# Altium PCB CV2018-DIFF.PcbDoc
Units mil, origin at the board's own origin, x right, y up, seen from the top; angles counter-clockwise.
Board outline 6299 x 3937 mil, 2 copper layers (TopLayer, BottomLayer); 56 components, 65 nets, 321 pads, 59 vias.
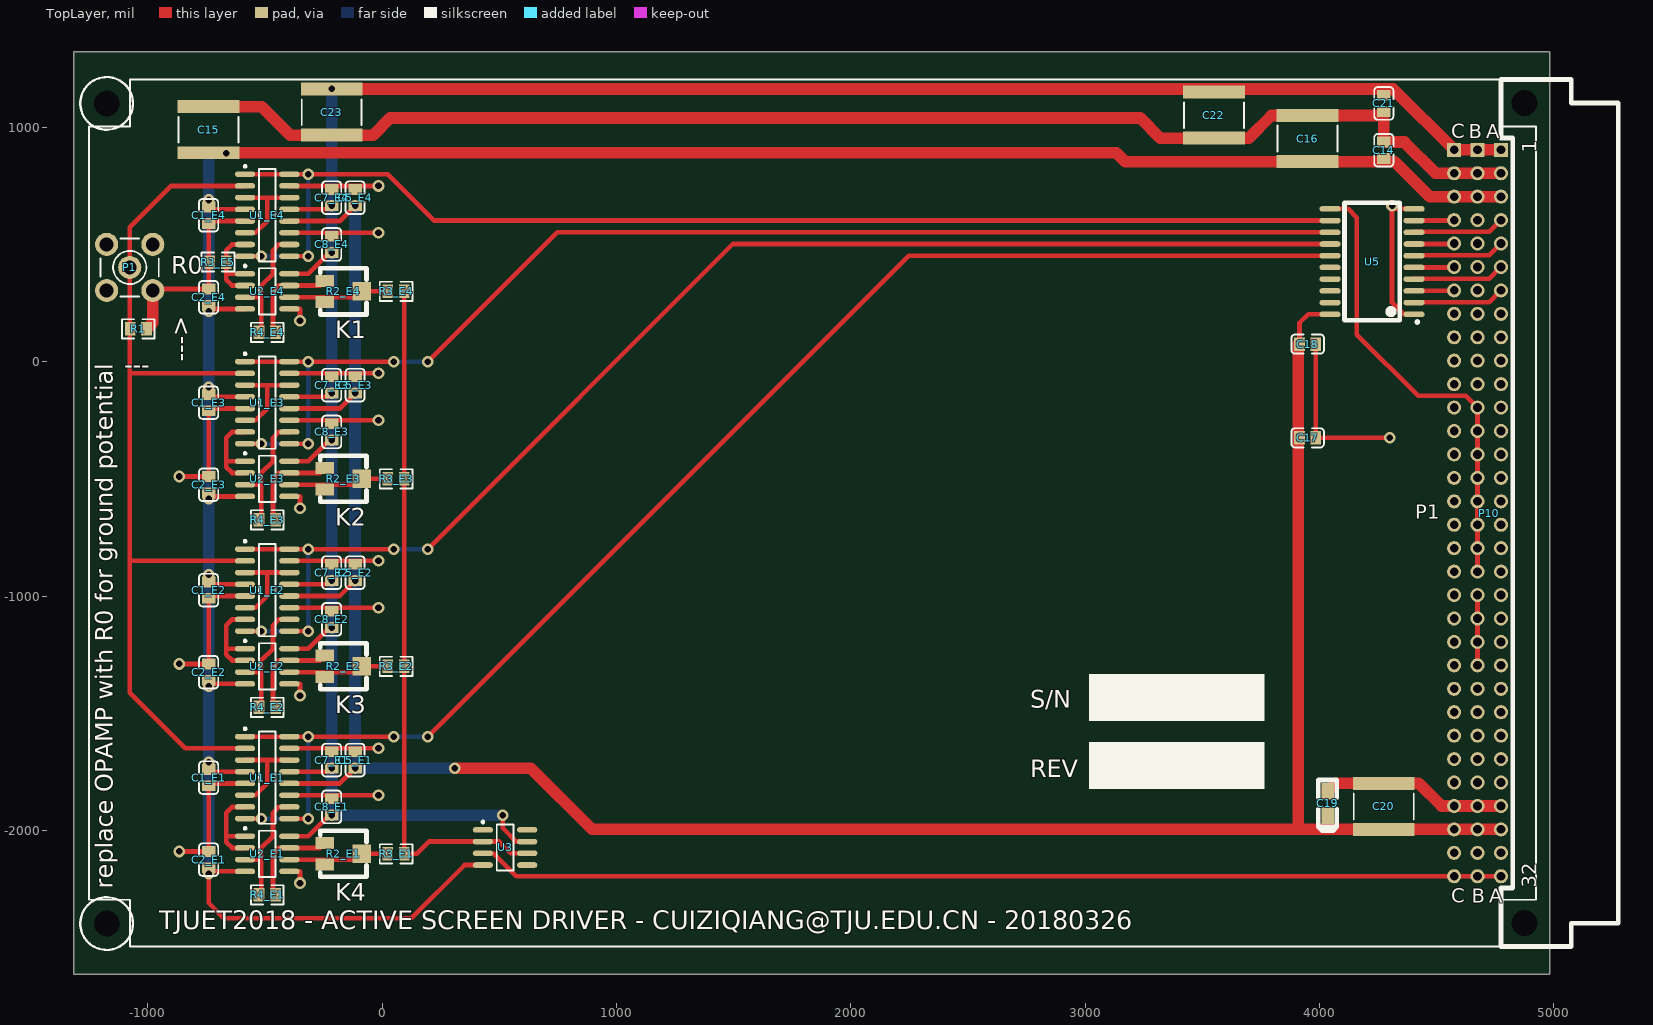
[diagram p0: TopLayer view]
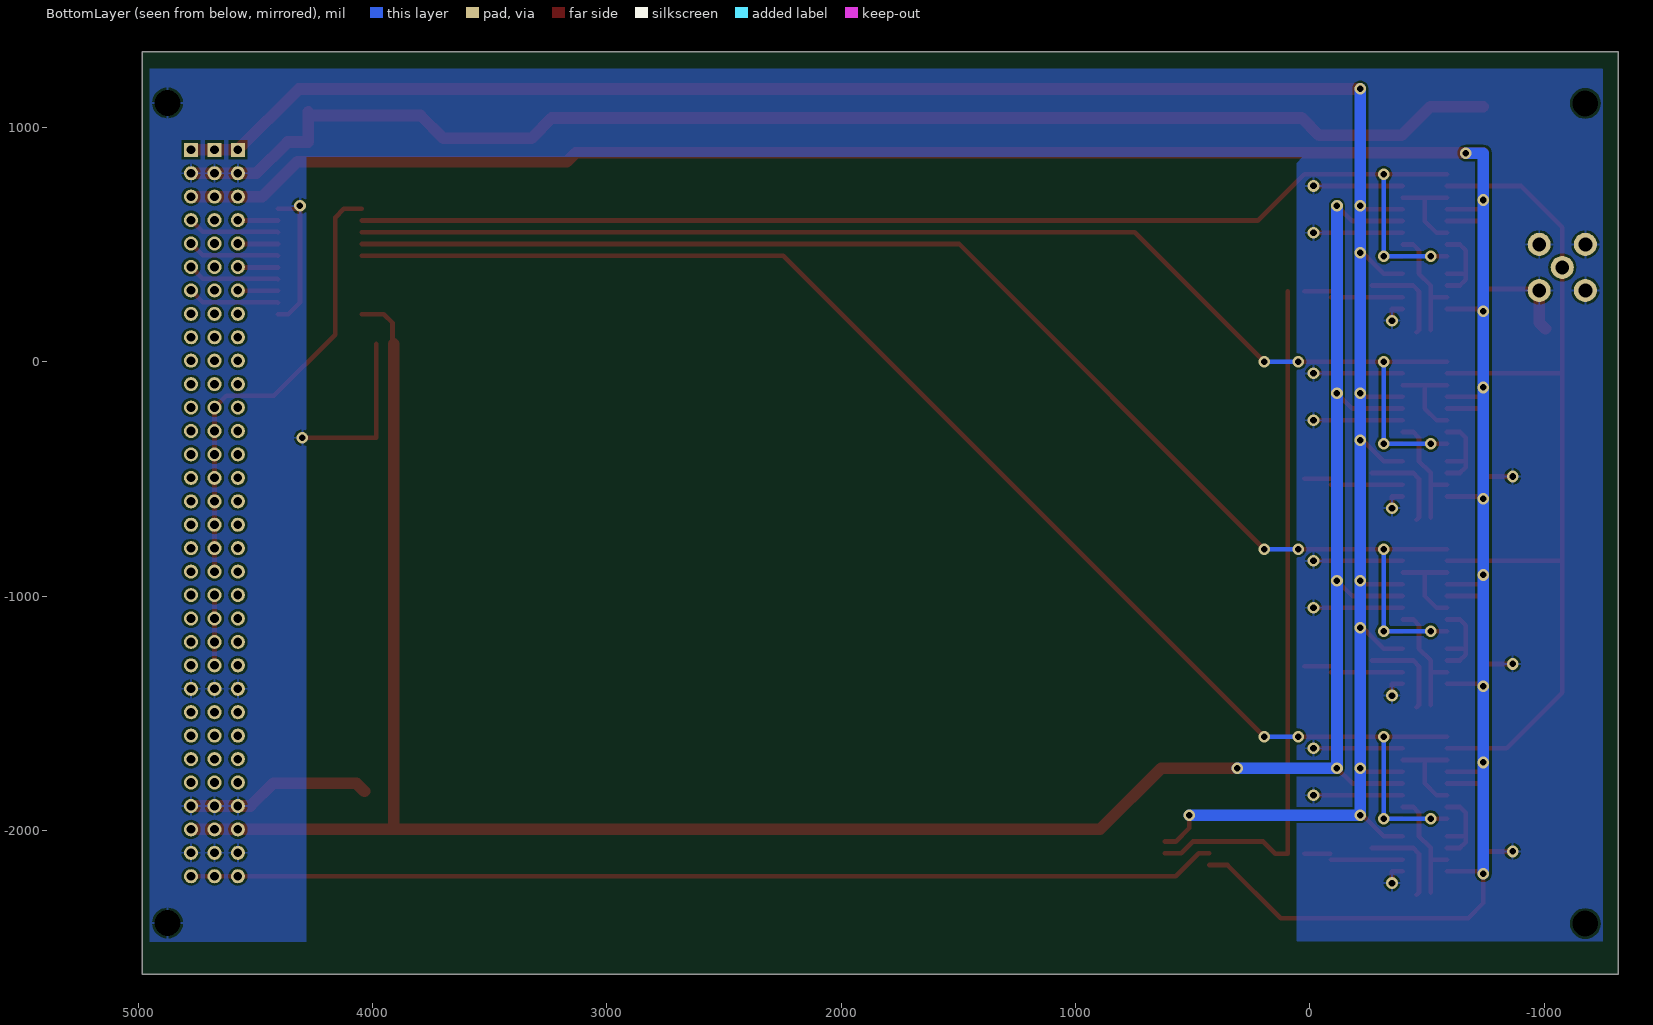
[diagram p1: BottomLayer view, seen from below]
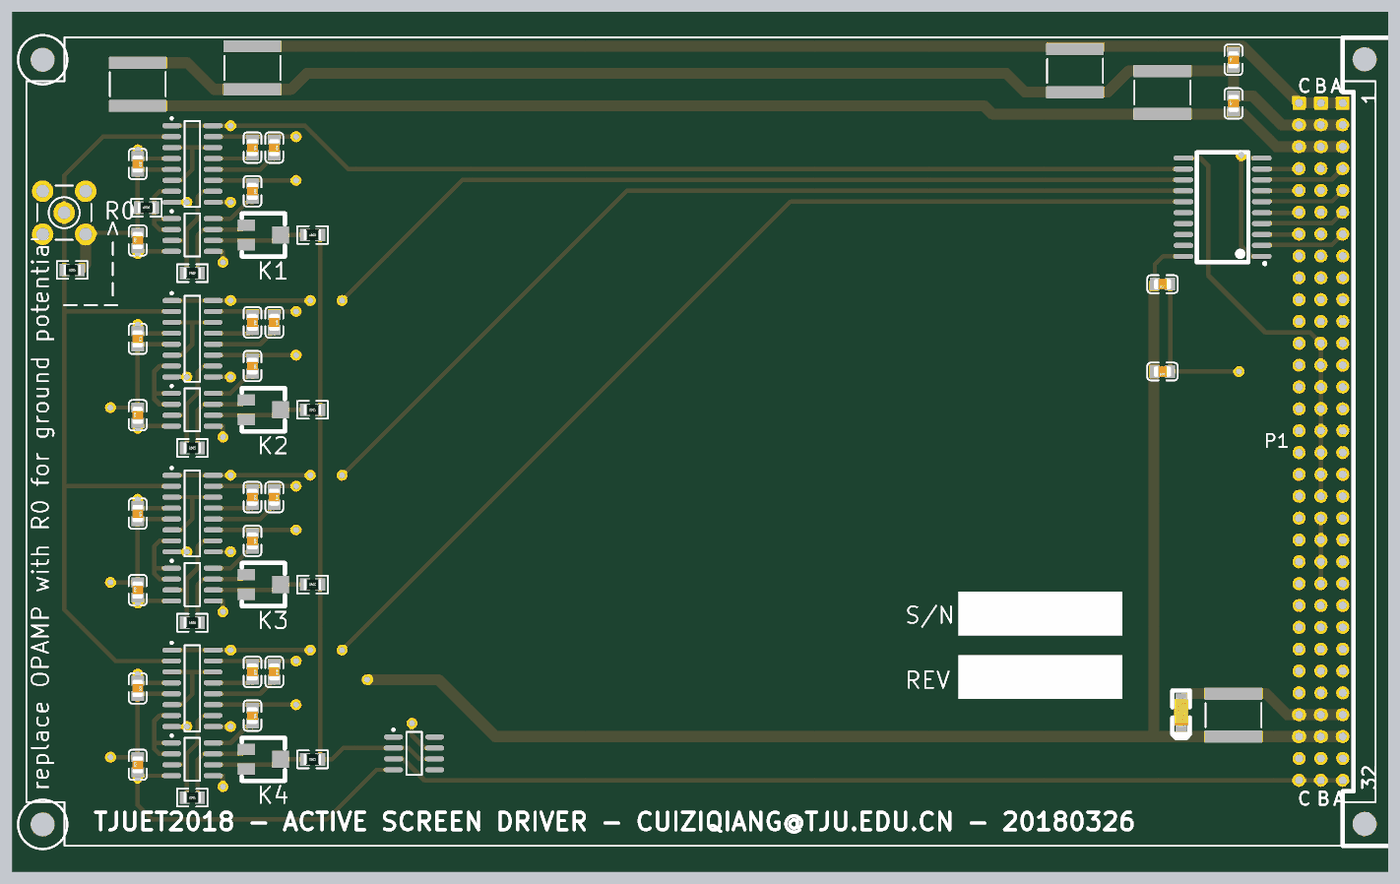
[diagram p2: 3D render of the assembled board from above, using the file's embedded part models]

## Layer stack, top to bottom
TopLayer: signal copper 1.4
Dielectric: core 12.6, FR-4, Dk 4.8
BottomLayer: signal copper 1.4

## Board outline
-1315.12,-2614.92 4983.88,-2614.92 4983.88,1322.08 -1315.12,1322.08

## Design rules (kind name [scope] priority, off if disabled: settings)
Clearance [All] p1: gap=10
FabricationTestPointUsage TestPointUsage [All] p1: valid=0 allowmultiple=FALSE
FabricationTestpoint Testpoint [All] p1: side=3 testpointundercomponent=TRUE minsize=40 maxsize=100 preferedsize=60 minholesize=20 maxholesize=40 preferedholesize=32 testpointgrid=1 allowsidetop=TRUE allowsidebottom=TRUE usegrid=TRUE gridtolerance=0.01
PlaneClearance [All] p1: clearance=10
PolygonConnect [All] p1: connectstyle=Relief reliefconductorwidth=10 reliefentries=4 polygonreliefangle="90 Angle" airgapwidth=10
RoutingVias [All] p1: holewidth=28 width=50 viastyle="Through Hole" minholewidth=28 minwidth=50 maxholewidth=28 maxwidth=50
SilkToSolderMaskClearance SilkscreenOverComponentPads [IsPad] p1: minsilkscreentomaskgap=10 clearancetoexposedcopper=TRUE
SolderMaskExpansion [All] p1: expansion=2
Width [All] p1: maxlimit=100 minlimit=10 preferedwidth=20
24 further rules are at their usual default settings.

## Classes and differential pairs
component class CV2018-DIFF: C14 C15 C16 C17 C18 C19 C20 C21 C22 C23 P1 P10 R1 U3 U5
component class E1: C1 C1_E1 C2 C2_E1 C3 C4 C5 C5_E1 C6 C7 C7_E1 C8 C8_E1 C9 C10 C12 C13 R2 R2_E1 R3 R3_E1 R4 R4_E1 R5 R6 R7 R8 R9 R10 R11 R12 U1_E1 U2_E1 U4
component class E2: C1_E2 C2_E2 C5_E2 C7_E2 C8_E2 R2_E2 R3_E2 R4_E2 U1_E2 U2_E2
component class E3: C1_E3 C2_E3 C5_E3 C7_E3 C8_E3 R2_E3 R3_E3 R4_E3 U1_E3 U2_E3
component class E4: C1_E4 C2_E4 C5_E4 C7_E4 C8_E4 R2_E4 R3_E4 R4_E4 U1_E4 U2_E4
net class SWA[1..4]: SWA1 SWA2 SWA3 SWA4
channel class CV2018-DIFFx1: E1 E2 E3 E4 E5 E6 E7

## Components (designator, comment, footprint, x,y, rotation, side; value= is the part's Value field where it differs from the comment)
C1_E1 "100nF(104) 10% 50V" LC-0805_C -739.96,-1775 r270 top (schematic designator C1)
C1_E2 "100nF(104) 10% 50V" LC-0805_C -739.96,-975 r270 top (schematic designator C1)
C1_E3 "100nF(104) 10% 50V" LC-0805_C -739.96,-175 r270 top (schematic designator C1)
C1_E4 "100nF(104) 10% 50V" LC-0805_C -739.96,625 r270 top (schematic designator C1)
C2_E1 "100nF(104) 10% 50V" LC-0805_C -739.96,-2125 r90 top (schematic designator C2)
C2_E2 "100nF(104) 10% 50V" LC-0805_C -739.96,-1325 r90 top (schematic designator C2)
C2_E3 "100nF(104) 10% 50V" LC-0805_C -739.96,-525 r90 top (schematic designator C2)
C2_E4 "100nF(104) 10% 50V" LC-0805_C -739.96,275 r90 top (schematic designator C2)
C5_E1 "100nF(104) 10% 50V" LC-0805_C -114.96,-1700 r270 top (schematic designator C5)
C5_E2 "100nF(104) 10% 50V" LC-0805_C -114.96,-900 r270 top (schematic designator C5)
C5_E3 "100nF(104) 10% 50V" LC-0805_C -114.96,-100 r270 top (schematic designator C5)
C5_E4 "100nF(104) 10% 50V" LC-0805_C -114.96,700 r270 top (schematic designator C5)
C7_E1 "100nF(104) 10% 50V" LC-0805_C -214.96,-1700 r270 top (schematic designator C7)
C7_E2 "100nF(104) 10% 50V" LC-0805_C -214.96,-900 r270 top (schematic designator C7)
C7_E3 "100nF(104) 10% 50V" LC-0805_C -214.96,-100 r270 top (schematic designator C7)
C7_E4 "100nF(104) 10% 50V" LC-0805_C -214.96,700 r270 top (schematic designator C7)
C8_E1 "100nF(104) 10% 50V" LC-0805_C -214.96,-1900 r270 top (schematic designator C8)
C8_E2 "100nF(104) 10% 50V" LC-0805_C -214.96,-1100 r270 top (schematic designator C8)
C8_E3 "100nF(104) 10% 50V" LC-0805_C -214.96,-300 r270 top (schematic designator C8)
C8_E4 "100nF(104) 10% 50V" LC-0805_C -214.96,500 r270 top (schematic designator C8)
C14 "100nF(104) 10% 50V" LC-0805_C 4274.88,902.08 r90 top
C15 "Cap Pol3" C2225 -739.96,989.96 r270 top
C16 "Cap Pol3" C2225 3949.88,952.08 r270 top
C17 "100nF(104) 10% 50V" LC-0805_C 3950,-325 r180 top
C18 "100nF(104) 10% 50V" LC-0805_C 3950,75 r180 top
C19 "10uF (106) ±10% 16V" LC-CASE-A_3216 4035.04,-1885.04 r270 top
C20 "Cap Pol3" C2225 4274.88,-1897.92 r90 top
C21 "100nF(104) 10% 50V" LC-0805_C 4274.88,1102.08 r90 top
C22 "Cap Pol3" C2225 3549.88,1052.08 r270 top
C23 "Cap Pol3" C2225 -214.96,1064.96 r270 top
P1 "SMB" SMB_V-RJ45 -1076.69,402.08 r0 top locked
P10 "CNVME96" CNVME96 4774.88,904.08 r90 top locked
R1 "150KΩ (1503) ±1%" LC-0805_R -1039.96,139.96 r0 top
R2_E1 "2K" POT4MM-2 -164.96,-2100 r0 top (schematic designator R2)
R2_E2 "2K" POT4MM-2 -164.96,-1300 r0 top (schematic designator R2)
R2_E3 "2K" POT4MM-2 -164.96,-500 r0 top (schematic designator R2)
R2_E4 "2K" POT4MM-2 -164.96,300 r0 top (schematic designator R2)
R3_E1 "1KΩ (1001) ±1%" LC-0805_R 60.04,-2100 r0 top (schematic designator R3)
R3_E2 "1KΩ (1001) ±1%" LC-0805_R 60.04,-1300 r0 top (schematic designator R3)
R3_E3 "1KΩ (1001) ±1%" LC-0805_R 60.04,-500 r0 top (schematic designator R3)
R3_E4 "1KΩ (1001) ±1%" LC-0805_R 60.04,300 r0 top (schematic designator R3)
R3_E5 "1KΩ (1001) ±1%" LC-0805_R -700,425 r0 top (schematic designator R3)
R4_E1 "1KΩ (1001) ±1%" LC-0805_R -489.96,-2275 r0 top (schematic designator R4)
R4_E2 "1KΩ (1001) ±1%" LC-0805_R -489.96,-1475 r0 top (schematic designator R4)
R4_E3 "1KΩ (1001) ±1%" LC-0805_R -489.96,-675 r0 top (schematic designator R4)
R4_E4 "1KΩ (1001) ±1%" LC-0805_R -489.96,125 r0 top (schematic designator R4)
U1_E1 "DG413CY" NSO16_N -489.96,-1775 r0 top (schematic designator U1)
U1_E2 "DG413CY" NSO16_N -489.96,-975 r0 top (schematic designator U1)
U1_E3 "DG413CY" NSO16_N -489.96,-175 r0 top (schematic designator U1)
U1_E4 "DG413CY" NSO16_N -489.96,625 r0 top (schematic designator U1)
U2_E1 "AD8066ARZ" ADI-R-8_N -489.96,-2100 r0 top (schematic designator U2)
U2_E2 "AD8066ARZ" ADI-R-8_N -489.96,-1300 r0 top (schematic designator U2)
U2_E3 "AD8066ARZ" ADI-R-8_N -489.96,-500 r0 top (schematic designator U2)
U2_E4 "AD8066ARZ" ADI-R-8_N -489.96,300 r0 top (schematic designator U2)
U3 "AD817ARZ" ADI-R-8_N 524.88,-2072.92 r0 top
U5 "74HC574D" LC-SOIC-20_300mil 4224.88,427.08 r90 top

## Footprints (in the part's own frame and the unit in brackets; to place one, negate y for a bottom-side part, rotate by r counter-clockwise, add the part's x,y. Pads: shape width x height; smd on the part's side, far side on the other; paste and mask are expansions set on the pad)
ADI-R-8_N [mm] "SOIC, 8-Leads, Body 4.9x3.9mm, Pitch 1.27mm, IPC Medium Density"
  oval 2.2x0.6 smd: 1(-2.4,1.905) 2(-2.4,0.635) 3(-2.4,-0.635) 4(-2.4,-1.905) 5(2.4,-1.905) 6(2.4,-0.635) 7(2.4,0.635) 8(2.4,1.905)
  silkscreen extent -2.52,-2.5 0.9,2.88, body extent -2,-2.5 2,2.5, height 1.75
C2225 [mm] "Chip Capacitor, Body 5.7x6.4mm, IPC High Density"
  rect 1.4x6.7 smd: 1(-2.5,0) 2(2.5,0)
  silkscreen extent -1.4,-3.25 1.4,3.25, body extent -2.95,-3.4 2.95,3.4, height 1.4
CNVME96 [mil]
  round 50 hole 110: 97(200,-100) 98(-3300,-100)
  rect 60x60 / inner round 60 / far side rect 60x60 hole 37: A1(0,0) B1(0,100) C1(0,200)
  round 60 hole 37: A2(-100,0) A3(-200,0) A4(-300,0) A5(-400,0) A6(-500,0) A7(-600,0) A8(-700,0) A9(-800,0) A10(-900,0) A11(-1000,0) A12(-1100,0) A13(-1200,0) A14(-1300,0) A15(-1400,0) A16(-1500,0) A17(-1600,0) A18(-1700,0) A19(-1800,0) A20(-1900,0) A21(-2000,0) A22(-2100,0) A23(-2200,0) A24(-2300,0) A25(-2400,0) A26(-2500,0) A27(-2600,0) A28(-2700,0) A29(-2800,0) A30(-2900,0) A31(-3000,0) A32(-3100,0) B2(-100,100) B3(-200,100) B4(-300,100) B5(-400,100) B6(-500,100) B7(-600,100) B8(-700,100) B9(-800,100) B10(-900,100) B11(-1000,100) B12(-1100,100) B13(-1200,100) B14(-1300,100) B15(-1400,100) B16(-1500,100) B17(-1600,100) B18(-1700,100) B19(-1800,100) B20(-1900,100) B21(-2000,100) B22(-2100,100) B23(-2200,100) B24(-2300,100) B25(-2400,100) B26(-2500,100) B27(-2600,100) B28(-2700,100) B29(-2800,100) B30(-2900,100) B31(-3000,100) B32(-3100,100) C2(-100,200) C3(-200,200) C4(-300,200) C5(-400,200) C6(-500,200) C7(-600,200) C8(-700,200) C9(-800,200) C10(-900,200) C11(-1000,200) C12(-1100,200) C13(-1200,200) C14(-1300,200) C15(-1400,200) C16(-1500,200) C17(-1600,200) C18(-1700,200) C19(-1800,200) C20(-1900,200) C21(-2000,200) C22(-2100,200) C23(-2200,200) C24(-2300,200) C25(-2400,200) C26(-2500,200) C27(-2600,200) C28(-2700,200) C29(-2800,200) C30(-2900,200) C31(-3000,200) C32(-3100,200)
  silkscreen extent -3400,-500 300,0
LC-0805_C [mm]
  rect 1.16x1.47 smd: 1(-0.89,0) 2(0.89,0)
  silkscreen extent -1.77,-1.04 1.77,1.04, body extent -1,-0.62 1,0.63, height 0.77
LC-0805_R [mm]
  rect 1.16x1.47 smd: 1(-0.89,0) 2(0.89,0)
  silkscreen extent -1.77,-1.04 1.77,1.03, body extent -1,-0.62 1,0.63, height 0.49
LC-CASE-A_3216 [mm]
  rect 1.8x1.35 smd: 1(1.31,0) 2(-1.31,0)
  silkscreen extent -2.54,-1 2.97,1, body extent -1.7,-0.84 1.7,0.84, height 1.71
LC-SOIC-20_300mil [mm]
  oval 0.6x2.3 smd: 1(-5.715,-4.55) 2(-4.445,-4.55) 3(-3.175,-4.55) 4(-1.905,-4.55) 5(-0.635,-4.55) 6(0.635,-4.55) 7(1.905,-4.55) 8(3.175,-4.55) 9(4.445,-4.55) 10(5.715,-4.55) 11(5.715,4.55) 12(4.445,4.55) 13(3.175,4.55) 14(1.905,4.55) 15(0.635,4.55) 16(-0.635,4.55) 17(-1.905,4.55) 18(-3.175,4.55) 19(-4.445,4.55) 20(-5.715,4.55)
  silkscreen extent -6.7,-5.05 6.38,3
NSO16_N [mm] "SOIC, 16-Leads, Body 9.9x3.9mm, Pitch 1.27mm, IPC Medium Density"
  oval 2.2x0.6 smd: 1(-2.4,4.445) 2(-2.4,3.175) 3(-2.4,1.905) 4(-2.4,0.635) 5(-2.4,-0.635) 6(-2.4,-1.905) 7(-2.4,-3.175) 8(-2.4,-4.445) 9(2.4,-4.445) 10(2.4,-3.175) 11(2.4,-1.905) 12(2.4,-0.635) 13(2.4,0.635) 14(2.4,1.905) 15(2.4,3.175) 16(2.4,4.445)
  silkscreen extent -2.52,-5 0.9,5.42, body extent -2,-5 2,5, height 1.75
POT4MM-2 [mm] "Square Trimming Potentiometer"
  rect 2x1.3 smd: CCW(-2,-1.15) CW(-2,1.15)
  rect 2x2 smd: W(2,0)
  silkscreen extent -2.5,-2.5 2.5,2.5
SMB_V-RJ45 [mm] "Connector; SMB Straight"
  round 2.5 hole 1.5: 1(0,0) 2(-2.5,-2.5) 2(-2.5,2.5) 2(2.5,-2.5) 2(2.5,2.5)
  silkscreen extent -3.15,-3.15 3.15,3.15

## Part data
C1_E1 C1_E2 C1_E3 C1_E4 C2_E1 C2_E2 C2_E3 C2_E4 C5_E1 C5_E2 C5_E3 C5_E4 C7_E1 C7_E2 C7_E3 C7_E4 C8_E1 C8_E2 C8_E3 C8_E4 C14 C17 C18 C21: library part "0805 100nF(104) 10% 50V", "贴片电容"
C15 C16 C20 C22 C23: "Polarized Capacitor (Surface Mount)"
C19: library part "3216 10uF (106) 10% 16V", "钽电容"
P1: "SMB Straight Connector"
P10: "96-Pin Connector (3x32 2.54mm grid)"
R1: library part "0805 150KΩ (1503) 1%", "贴片电阻"
R2_E1 R2_E2 R2_E3 R2_E4: library part "RPot SM", "Square Trimming Potentiometer"
R3_E1 R3_E2 R3_E3 R3_E4 R3_E5 R4_E1 R4_E2 R4_E3 R4_E4: library part "0805 1KΩ (1001) 1%", "贴片电阻"
U1_E1 U1_E2 U1_E3 U1_E4: "Improved, Quad, SPST Analog Switches"
U2_E1 U2_E2 U2_E3 U2_E4: "Double Channel Low Power Operational Amplifier, 145 MHz BW, 180 V/us SR, Industrial, 8-pin SOIC (R-8), Tube"
U3: "Single Channel Low Power Operational Amplifier, 50 MHz BW, 350 V/us SR, Industrial, 8-pin SOIC (R-8), Tube"
U5: library part 74HC573D, "74系列逻辑芯片"

## Free pads (board coordinates)
  round 50 hole 110: 1(-1175.12,1102.08) 2(-1175.12,-2397.92)

## Via types
v1: diameter 50, hole 28, TopLayer to BottomLayer, 59 vias

## Nets (pads, with @x,y where several pads share a name; then routed paths per layer and width w, separated by ;. In a path a pad name is that pad's centre, name@x,y a point inside that pad or via, vN(x,y) a via of type N, cw(c..) or ccw(c..) an arc to the next point about the centre after c; other vN are vias at no path point)
+5V: C5_E1.2 C5_E2.2 C5_E3.2 C5_E4.2 C17.2 C18.2 C19.1 C20.1 P10.A30 P10.B30 P10.C30 U1_E1.12 U1_E2.12 U1_E3.12 U1_E4.12 U5.20 | length 10934.7
  TopLayer w20: U1_E1.12 -179.92,-1800 v1(-114.96,-1735.04) ; U1_E2.12 -179.92,-1000 v1(-114.96,-935.04) ; U1_E3.12 -179.92,-200 v1(-114.96,-135.04) ; U1_E4.12 -179.92,600 v1(-114.96,664.96) ; C18.2 3914.96,164.96 3952.08,202.08 U5.20
  TopLayer w50: v1(310.04,-1735.04) 635.04,-1735.04 895.92,-1995.92 3910.04,-1995.92 ; C18.2@3909.92,75 3909.92,-322.92 3909.92,-1995.8 3910.04,-1995.92 ; P10.A30 P10.B30 P10.C30 3910.04,-1995.92
  BottomLayer w50: v1(-114.96,664.96) v1(-114.96,-135.04) v1(-114.96,-1735.04) v1(310.04,-1735.04)
+12V: C7_E1.2 C7_E2.2 C7_E3.2 C7_E4.2 C8_E1.2 C8_E2.2 C8_E3.2 C8_E4.2 C21.2 C22.1 C23.1 P10.A1 P10.B1 P10.C1 U1_E1.13 U1_E2.13 U1_E3.13 U1_E4.13 U2_E1.8 U2_E2.8 U2_E3.8 U2_E4.8 U3.7 | length 10643.8
  TopLayer w20: U2_E1.8 -314.96,-2025 -225,-1935.04 v1(-214.96,-1935.04) ; U1_E1.13 C7_E1.2@-229.92,-1750 ; U2_E2.8 -314.96,-1225 -225,-1135.04 v1(-214.96,-1135.04) ; U1_E2.13 C7_E2.2@-229.92,-950 ; U2_E3.8 -314.96,-425 -225,-335.04 v1(-214.96,-335.04) ; U1_E3.13 C7_E3.2@-229.92,-150 ; U2_E4.8 -314.96,375 -225,464.96 v1(-214.96,464.96) ; U1_E4.13 C7_E4.2@-229.92,650 ; v1(514.96,-1935.04) 514.96,-1989.96 572.92,-2047.92 U3.7
  TopLayer w50: C23.1 4315.57,1163.39 P10.C1 P10.B1 P10.A1
  BottomLayer w50: v1(-214.96,1164.96) v1(-214.96,664.96) v1(-214.96,464.96) v1(-214.96,-135.04) v1(-214.96,-335.04) v1(-214.96,-935.04) v1(-214.96,-1135.04) v1(-214.96,-1735.04) v1(-214.96,-1935.04) v1(514.96,-1935.04)
-12V: C1_E1.1 C1_E2.1 C1_E3.1 C1_E4.1 C2_E1.1 C2_E2.1 C2_E3.1 C2_E4.1 C14.1 C15.2 C16.2 P10.A3 P10.B3 P10.C3 U1_E1.4 U1_E2.4 U1_E3.4 U1_E4.4 U2_E1.4 U2_E2.4 U2_E3.4 U2_E4.4 U3.4 | length 11359.7
  TopLayer w20: v1(-739.96,-2185.04) -739.96,-2310.04 -675,-2375 125,-2375 352.08,-2147.92 U3.4 ; C1_E1.1 -729.92,-1750 U1_E1.4 ; C1_E2.1 -729.92,-950 U1_E2.4 ; C1_E3.1 -729.92,-150 U1_E3.4 ; C1_E4.1 -729.92,650 U1_E4.4 ; C2_E1.1@-725,-2175 U2_E1.4 ; C2_E2.1@-725,-1375 U2_E2.4 ; C2_E3.1@-725,-575 U2_E3.4 ; C2_E4.1@-725,225 U2_E4.4
  TopLayer w50: C15.2 3133.46,891.54 3171.35,853.65 C16.2 4321.35,853.65 4470.92,704.08 P10.C3 P10.B3 P10.A3
  BottomLayer w50: v1(-739.96,-2185.04) v1(-739.96,-1710.04) v1(-739.96,-1385.04) v1(-739.96,-910.04) v1(-739.96,-585.04) v1(-739.96,-110.04) v1(-739.96,214.96) v1(-739.96,689.96) -739.96,889.96 v1(-664.96,889.96)
A0: P10.C12
A1: P10.A12
A2: P10.C13
A3: P10.A13
A4: P10.C14
A5: P10.A14
A6: P10.C15
A7: P10.A15
A8: P10.C16
A9: P10.A16
A10: P10.C17
A11: P10.A17
A12: P10.C18
A13: P10.A18
A14: P10.C19
A15: P10.A19
AGND: C1_E1.2 C1_E2.2 C1_E3.2 C1_E4.2 C2_E1.2 C2_E2.2 C2_E3.2 C2_E4.2 C5_E1.1 C5_E2.1 C5_E3.1 C5_E4.1 C7_E1.1 C7_E2.1 C7_E3.1 C7_E4.1 C8_E1.1 C8_E2.1 C8_E3.1 C8_E4.1 C14.2 C15.1 C16.1 C17.1 C18.1 C19.2 C20.2 C21.1 C22.2 C23.2 P1.2 P10.97 P10.98 P10.A2 P10.A24 P10.A29 P10.A31 P10.B2 P10.B24 P10.B29 P10.B31 P10.C2 P10.C24 P10.C29 P10.C31 R1.2 R3_E5.1 U1_E1.5 U1_E1.11 U1_E1.15 U1_E2.5 U1_E2.11 U1_E2.15 U1_E3.5 U1_E3.11 U1_E3.15 U1_E4.5 U1_E4.11 U1_E4.15 U2_E1.5 U2_E2.5 U2_E3.5 U2_E4.5 U5.1 U5.10 | length 13969.6
  TopLayer w20: P1.2@-971.88,310.04 C2_E4.2 C1_E4.2 ; v1(-864.96,-2089.96) C2_E1.2 C1_E1.2 ; v1(-864.96,-1289.96) C2_E2.2 C1_E2.2 ; v1(-864.96,-489.96) C2_E3.2 C1_E3.2 ; C1_E1.2@-729.92,-1800 U1_E1.5 ; C1_E2.2@-729.92,-1000 U1_E2.5 ; C1_E3.2@-729.92,-200 U1_E3.5 ; C1_E4.2@-729.92,600 U1_E4.5 ; U2_E1.5 -350,-2175 v1(-350,-2225) ; U1_E1.11 v1(-14.96,-1850) ; U1_E1.15 v1(-14.96,-1650) ; U2_E2.5 -350,-1375 v1(-350,-1425) ; U1_E2.11 v1(-14.96,-1050) ; U1_E2.15 v1(-14.96,-850) ; U2_E3.5 -350,-575 v1(-350,-625) ; U1_E3.11 v1(-14.96,-250) ; U1_E3.15 v1(-14.96,-50) ; U2_E4.5 -350,225 v1(-350,175) ; U1_E4.11 v1(-14.96,550) ; U1_E4.15 v1(-14.96,750) ; C8_E1.1@-229.92,-1850 C8_E1.1 ; C8_E2.1@-229.92,-1050 C8_E2.1 ; C8_E3.1@-229.92,-250 C8_E3.1 ; C8_E4.1@-229.92,550 C8_E4.1 ; C18.1 C17.1 v1(4300,-325) ; U5.1 4360.04,202.08 4310.04,252.08 v1(4310.04,664.96) 4322.92,652.08 U5.10
  TopLayer w50: R1.2 -978.27,166.61 P1.2@-978.27,303.65 ; C15.1 -513.39,1088.39 -391.54,966.54 C23.2 -38.39,966.54 35.04,1039.96 3235.04,1039.96 3321.35,953.65 C22.2 3698.73,953.65 3795.58,1050.5 C16.1 C21.1@4258.35,1050.5 ; C19.2 4069.01,-1799.5 C20.2 4424.5,-1799.5 4520.92,-1895.92 P10.C29 P10.B29 P10.A29 ; C21.1 C14.2 4362.88,937.12 4495.92,804.08 P10.C2 P10.B2 P10.A2
CLK: P10.B12 P10.B13 P10.B14 P10.B15 P10.B16 P10.B17 P10.B18 P10.B19 U5.11 | length 1973.3
  TopLayer w20: U5.11 4122.92,652.08 4160.04,614.96 4160.04,114.96 4420.92,-145.92 4624.88,-145.92 P10.B12 P10.B13 P10.B14 P10.B15 P10.B16 P10.B17 P10.B18 P10.B19
D0: P10.C4 U5.9 | length 168.9
  TopLayer w20: U5.9 P10.C4@4572.88,602.08
D1: P10.A4 U5.8 | length 392.4
  TopLayer w20: U5.8 4406.02,554.08 4724.88,554.08 P10.A4
D2: P10.C5 U5.7 | length 168.9
  TopLayer w20: U5.7 P10.C5@4572.88,502.08
D3: P10.A5 U5.6 | length 392.4
  TopLayer w20: U5.6 4406.02,454.08 4724.88,454.08 P10.A5
D4: P10.C6 U5.5 | length 168.9
  TopLayer w20: U5.5 P10.C6@4572.88,402.08
D5: P10.A6 U5.4 | length 392.4
  TopLayer w20: U5.4 4406.02,354.08 4724.88,354.08 P10.A6
D6: P10.C7 U5.3 | length 168.9
  TopLayer w20: U5.3 P10.C7@4572.88,302.08
D7: P10.A7 U5.2 | length 392.4
  TopLayer w20: U5.2 4406.02,254.08 4724.88,254.08 P10.A7
D8: P10.C8
D9: P10.A8
D10: P10.C9
D11: P10.A9
D12: P10.C10
D13: P10.A10
D14: P10.C11
D15: P10.A11
ELE: P1.1 R1.1 U1_E1.2 U1_E2.2 U1_E3.2 U1_E4.2 | length 4126.9
  TopLayer w20: -1076.69,-50 U1_E3.2 ; U1_E1.2 -839.96,-1650 -1076.69,-1413.27 -1076.69,-850 ; U1_E2.2 -1076.69,-850 ; U1_E4.2 -900.2,750 -1076.69,573.5 P1.1 -1076.69,-850
NetP10_B20: P10.B20 P10.B21 P10.B22 P10.B23 | length 300
  TopLayer w20: P10.B23 P10.B22 P10.B21 P10.B20
NetR2_E1_CCW: R2_E1.CCW R2_E1.W R3_E1.1 U2_E1.6 | length 416.7
  TopLayer w20: U2_E1.6 R2_E1.W@-89.96,-2125 ; R2_E1.W R3_E1.1
NetR2_E1_CW: R2_E1.CW R4_E1.2 U2_E1.7 | length 390.5
  TopLayer w20: R4_E1.2 -464.96,-2264.96 -464.96,-2100 -439.96,-2075 U2_E1.7 R2_E1.CW@-263.98,-2075
NetR2_E2_CCW: R2_E2.CCW R2_E2.W R3_E2.1 U2_E2.6 | length 416.7
  TopLayer w20: U2_E2.6 R2_E2.W@-89.96,-1325 ; R2_E2.W R3_E2.1
NetR2_E2_CW: R2_E2.CW R4_E2.2 U2_E2.7 | length 390.5
  TopLayer w20: R4_E2.2 -464.96,-1464.96 -464.96,-1300 -439.96,-1275 U2_E2.7 R2_E2.CW@-263.98,-1275
NetR2_E3_CCW: R2_E3.CCW R2_E3.W R3_E3.1 U2_E3.6 | length 416.7
  TopLayer w20: U2_E3.6 R2_E3.W@-89.96,-525 ; R2_E3.W R3_E3.1
NetR2_E3_CW: R2_E3.CW R4_E3.2 U2_E3.7 | length 390.5
  TopLayer w20: R4_E3.2 -464.96,-664.96 -464.96,-500 -439.96,-475 U2_E3.7 R2_E3.CW@-263.98,-475
NetR2_E4_CCW: R2_E4.CCW R2_E4.W R3_E4.1 U2_E4.6 | length 416.7
  TopLayer w20: U2_E4.6 R2_E4.W@-89.96,275 ; R2_E4.W R3_E4.1
NetR2_E4_CW: R2_E4.CW R4_E4.2 U2_E4.7 | length 390.5
  TopLayer w20: R4_E4.2 -464.96,135.04 -464.96,300 -439.96,325 U2_E4.7 R2_E4.CW@-263.98,325
NetR4_E1_1: R4_E1.1 U1_E1.10 U2_E1.3 | length 510
  TopLayer w20: U2_E1.3 -514.96,-2125 ; R4_E1.1@-514.96,-2264.96 -514.96,-2075 -464.96,-2025 -464.96,-1925 -439.96,-1900 U1_E1.10
NetR4_E2_1: R4_E2.1 U1_E2.10 U2_E2.3 | length 510
  TopLayer w20: U2_E2.3 -514.96,-1325 ; R4_E2.1@-514.96,-1464.96 -514.96,-1275 -464.96,-1225 -464.96,-1125 -439.96,-1100 U1_E2.10
NetR4_E3_1: R4_E3.1 U1_E3.10 U2_E3.3 | length 510
  TopLayer w20: U2_E3.3 -514.96,-525 ; R4_E3.1@-514.96,-664.96 -514.96,-475 -464.96,-425 -464.96,-325 -439.96,-300 U1_E3.10
NetR4_E4_1: R4_E4.1 U1_E4.10 U2_E4.3 | length 510
  TopLayer w20: U2_E4.3 -514.96,275 ; R4_E4.1@-514.96,135.04 -514.96,325 -464.96,375 -464.96,475 -439.96,500 U1_E4.10
NetU1_E1_3: U1_E1.3 U1_E1.6 U1_E1.14 | length 404.2
  TopLayer w20: U1_E1.6 -539.96,-1850 -489.96,-1800 -489.96,-1700 ; U1_E1.3 -489.96,-1700 ; U1_E1.14 -489.96,-1700
NetU1_E1_7: U1_E1.7 U2_E1.1 U2_E1.2 | length 387.2
  TopLayer w20: -664.96,-2025 U2_E1.1 ; U2_E1.2 -639.96,-2075 -664.96,-2050 -664.96,-1925 -639.96,-1900 U1_E1.7
NetU1_E2_3: U1_E2.3 U1_E2.6 U1_E2.14 | length 404.2
  TopLayer w20: U1_E2.6 -539.96,-1050 -489.96,-1000 -489.96,-900 ; U1_E2.3 -489.96,-900 ; U1_E2.14 -489.96,-900
NetU1_E2_7: U1_E2.7 U2_E2.1 U2_E2.2 | length 387.2
  TopLayer w20: -664.96,-1225 U2_E2.1 ; U2_E2.2 -639.96,-1275 -664.96,-1250 -664.96,-1125 -639.96,-1100 U1_E2.7
NetU1_E3_3: U1_E3.3 U1_E3.6 U1_E3.14 | length 404.2
  TopLayer w20: U1_E3.6 -539.96,-250 -489.96,-200 -489.96,-100 ; U1_E3.3 -489.96,-100 ; U1_E3.14 -489.96,-100
NetU1_E3_7: U1_E3.7 U2_E3.1 U2_E3.2 | length 387.2
  TopLayer w20: -664.96,-425 U2_E3.1 ; U2_E3.2 -639.96,-475 -664.96,-450 -664.96,-325 -639.96,-300 U1_E3.7
NetU1_E4_3: U1_E4.3 U1_E4.6 U1_E4.14 | length 404.2
  TopLayer w20: U1_E4.6 -539.96,550 -489.96,600 -489.96,700 ; U1_E4.3 -489.96,700 ; U1_E4.14 -489.96,700
NetU1_E4_7: R3_E5.2 U1_E4.7 U2_E4.1 U2_E4.2 | length 387.2
  TopLayer w20: -664.96,375 U2_E4.1 ; U2_E4.2 -639.96,325 -664.96,350 -664.96,475 -639.96,500 U1_E4.7
SWA1: U1_E1.1 U1_E1.8 U1_E1.9 U1_E1.16 U5.15 | length 6180.2
  TopLayer w20: U1_E1.8 v1(-514.96,-1950) ; U1_E1.1 U1_E1.16 v1(-314.96,-1600) v1(50,-1600) ; U1_E1.9 v1(-314.96,-1950) ; v1(195.08,-1600) 2247.16,452.08 U5.15
  BottomLayer w20: v1(-514.96,-1950) v1(-314.96,-1950) v1(-314.96,-1600) ; v1(50,-1600) v1(195.08,-1600)
SWA2: U1_E2.1 U1_E2.8 U1_E2.9 U1_E2.16 U5.14 | length 5869.5
  TopLayer w20: U1_E2.8 v1(-514.96,-1150) ; U1_E2.1 U1_E2.16 v1(-314.96,-800) v1(50,-800) ; U1_E2.9 v1(-314.96,-1150) ; v1(195.08,-800) 1497.16,502.08 U5.14
  BottomLayer w20: v1(-514.96,-1150) v1(-314.96,-1150) v1(-314.96,-800) ; v1(50,-800) v1(195.08,-800)
SWA3: U1_E3.1 U1_E3.8 U1_E3.9 U1_E3.16 U5.13 | length 5558.9
  TopLayer w20: U1_E3.8 v1(-514.96,-350) ; U1_E3.1 U1_E3.16 v1(-314.96,0) v1(50,0) ; U1_E3.9 v1(-314.96,-350) ; v1(195.08,0) 747.16,552.08 U5.13
  BottomLayer w20: v1(-514.96,-350) v1(-314.96,-350) v1(-314.96,0) ; v1(50,0) v1(195.08,0)
SWA4: U1_E4.1 U1_E4.8 U1_E4.9 U1_E4.16 U5.12 | length 5412.2
  TopLayer w20: U1_E4.8 v1(-514.96,450) ; U1_E4.1 U1_E4.16 v1(-314.96,800) 25,800 222.92,602.08 U5.12 ; U1_E4.9 v1(-314.96,450)
  BottomLayer w20: v1(-514.96,450) v1(-314.96,450) v1(-314.96,800)
VE: P10.A32 P10.B32 P10.C32 U3.3 | length 4385.1
  TopLayer w20: U3.3 474.88,-2097.92 572.88,-2195.92 P10.C32 P10.B32 P10.A32
VE-AS: R3_E1.2 R3_E2.2 R3_E3.2 R3_E4.2 U3.2 U3.6 | length 2963.6
  TopLayer w20: R3_E4.2 R3_E3.2 R3_E2.2 R3_E1.2 147.8,-2100 199.88,-2047.92 U3.2 499.88,-2047.92 ; 501.96,-2050 549.88,-2097.92 U3.6
pads on no net: P10.A20 P10.A21 P10.A22 P10.A23 P10.A25 P10.A26 P10.A27 P10.A28 P10.B4 P10.B5 P10.B6 P10.B7 P10.B8 P10.B9 P10.B10 P10.B11 P10.B25 P10.B26 P10.B27 P10.B28 P10.C20 P10.C21 P10.C22 P10.C23 P10.C25 P10.C26 P10.C27 P10.C28 U3.1 U3.5 U3.8 U5.16 U5.17 U5.18 U5.19

## Polygon pours and split planes (outlines as drawn)
AGND on BottomLayer "GND" (solid, remove dead copper, pour order 7): 4950,-2475 4950,1249.87 4949.88,1250 -1247.95,1250 -1250,1247.87 -1250,-2472.79 54.58,-2472.79 56.71,-2475 56.71,847.02 31.09,873.6 4283.9,873.6 4283.9,-2475

## Other copper
TopLayer:
  text ".GTL" at 4683.88,1472.08 h90
BottomLayer:
  text "P/N XXXXXX-XXX REV A" at 4.88,1522.08 h75
  text ".GBL" at 4683.88,1472.08 h90

## Silkscreen, mask and mechanical layers (free items; w line width, h text height)
TopOverlay:
  circle w10: c-1175.12,1102.08 r112.5
  circle w10: c-1175.12,-2397.92 r112.5
  rectangle: 3015.88,-1823.35 3765.88,-1623.35
  rectangle: 3015.88,-1533.35 3765.88,-1333.35
  lines w8: -1250.12,-2295.92 -1075.12,-2295.92 -1075.12,-2495.92 4774.88,-2495.92 4774.88,-2295.92 4924.88,-2295.92 4924.88,1004.08 4774.88,1004.08 4774.88,1204.08 -1075.12,1204.08 -1075.12,1004.08 -1250.12,1004.08 -1250.12,-2295.92
  lines w10: 77.47,2118.05 ccw(c125.88,2157.58) 77.59,2117.91
  text "C" at 180.88,2120.08 h60
  text "2002 COMPANY NAME" at 330.88,2120.08 h75
  text "BOARD NAME" at 180.88,1945.08 h75
  text "ASSY NO.: XXXXXX" at 180.88,1795.08 h75
  text ".GTO" at 4683.88,1472.08 h90
  text "R0" at -900,375 h75
  text "K1" at -200,100 h75
  text "--->" at -825,0 h75 r90
  text "---" at -1100,-50 h75
  text "P1" at 4408.21,-670.92 h60
  text "K2" at -200,-700 h75
  text "S/N" at 2765.88,-1475.85 h75
  text "K3" at -200,-1500 h75
  text "REV" at 2765.88,-1773.35 h75
  text "replace OPAMP with R0 for ground potential" at -1150,-2250 h75 r90
  text "K4" at -200,-2300 h75
  text "TJUET2018 - ACTIVE SCREEN DRIVER - CUIZIQIANG@TJU.EDU.CN - 20180326" at -950.12,-2422.92 h80
TopPaste:
  text ".GTP" at 4683.88,1472.08 h90
BottomPaste:
  text ".GBP" at 4683.88,1472.08 h90
TopSolder:
  text ".GTS" at 4683.88,1472.08 h90
BottomSolder:
  text ".GBS" at 4683.88,1472.08 h90
Mechanical1:
  the board outline again, w20
Mechanical4:
  text ".Pcb_File_Name_No_Path" at 2783.88,1662.08 h90
  text ".Printout_Name" at 2783.88,1472.08 h90
DrillDrawing:
  text ".LEGEND" at 5499.88,-2425.92 h90
  text "Drilling Details." at 5499.88,-2575.92 h90

## Dimensions
-1335.12,-2397.92 to -1315.12,-2614.92 on Mechanical4
-1175.12,-2634.92 to -1315.12,-2614.92 on Mechanical4

## Text inside footprints (layer, text, board x,y; h text height)
P10: TopOverlay "1" at 4924.88,891.58 h60 r90; TopOverlay "32" at 4924.88,-2245.92 h60 r90; TopOverlay "A" at 4724.88,-2308.42 h60; TopOverlay "B" at 4649.88,-2308.42 h60; TopOverlay "C" at 4562.38,-2308.42 h60; TopOverlay "A" at 4712.38,954.08 h60; TopOverlay "B" at 4637.38,954.08 h60; TopOverlay "C" at 4562.38,954.08 h60